# Altium PCB regulator_interposer.pcbdoc
Units mil, origin at the board's own origin, x right, y up, seen from the top; angles counter-clockwise.
Board outline 525 x 425 mil, 2 copper layers (Top Layer, Bottom Layer); 3 components, 3 nets, 7 pads, 0 vias.
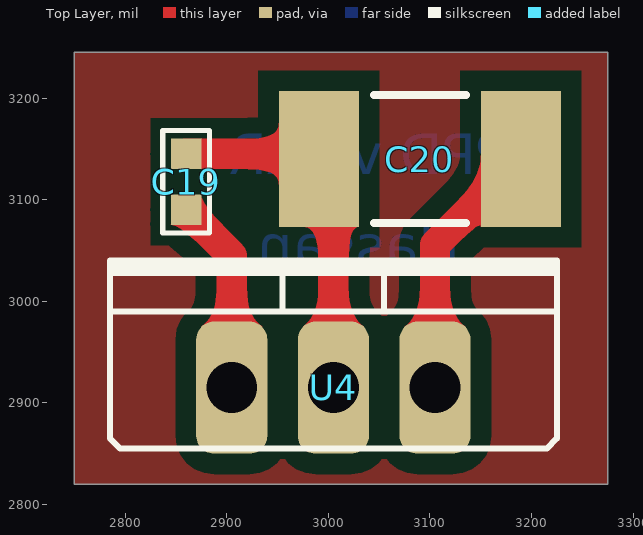
[diagram p0: Top Layer view]
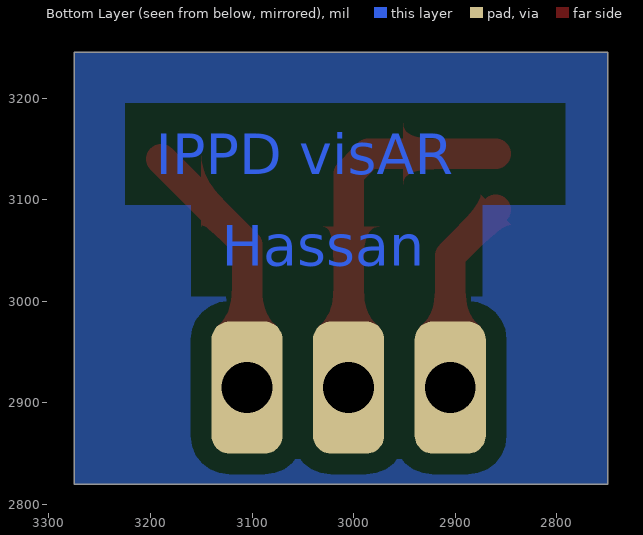
[diagram p1: Bottom Layer view, seen from below]

## Layer stack, top to bottom
Top Solder: solder mask 0.4, Solder Resist, Dk 3.5
Top Layer: signal copper 1.4
Dielectric 1: dielectric 12.6, FR-4, Dk 4.8
Bottom Layer: signal copper 1.4
Bottom Solder: solder mask 0.4, Solder Resist, Dk 3.5

## Board outline
2750,2820 2750,3245 3275,3245 3275,2820

## Design rules (kind name [scope] priority, off if disabled: settings)
Clearance "Poly Clearance" [All vs InPolygon] p1: gap=20
Clearance [All] p2: gap=10
PolygonConnect [All] p1: connectstyle=Relief reliefconductorwidth=10 reliefentries=4 polygonreliefangle="90 Angle" airgapwidth=10
RoutingVias [All] p1: holewidth=28 width=50 viastyle="Through Hole" minholewidth=28 minwidth=50 maxholewidth=28 maxwidth=50
SolderMaskExpansion [All] p1: expansion=4
Width [All] p1: maxlimit=100 minlimit=10 preferedwidth=10 bottomlayer_maxwidth=10 minimp=50.000000 maximp=50.000000 favimp=50.000000
30 further rules are at their usual default settings.

## Components (designator, comment, footprint, x,y, rotation, side; value= is the part's Value field where it differs from the comment)
C19 "100nF" 0603C-GENERIC 2860,3090 r90 top
C20 "10uF" CAPC6032X25N 3090,3140 r180 top
U4 "L7803" to220-123-v 2905,2915 r0 top

## Footprints (in the part's own frame and the unit in brackets; to place one, negate y for a bottom-side part, rotate by r counter-clockwise, add the part's x,y. Pads: shape width x height; smd on the part's side, far side on the other; paste and mask are expansions set on the pad)
0603C-GENERIC [mil] "CAPACITOR 0603"
  rect 30x30 smd: 1(0,0) 2(55,0)
  silkscreen extent -23,-23 78,23, body extent -4,-15 59,15, height 19
CAPC6032X25N [mm] "Chip Capacitor, 2-Leads, Body 6.00x3.20mm, IPC Medium Density"
  rect 2x3.4 smd: 1(-2.525,0) 2(2.525,0)
  silkscreen extent -1.15,-1.6 1.15,1.6, body extent -3.15,-1.7 3.15,1.7, height 2.5
to220-123-v [mil] "TO220 123 pin numbering Vertical mount"
  rrect50% 70x130 hole 50: 1(0,0) 2(100,0) 3(200,0)
  silkscreen extent -120,-60 320,125, body extent -121,-59 321,126, height 945

## Part data
C19: library part 0603C-100NF-25V-X7R-TDK, "CAPACITOR 0603 CERAMIC"
C20: library part 0603C-10UF-10V-X5R-TDK, "CAPACITOR 2413 TANT"
U4: library part L7805-TO220, "LINEAR REGULATOR 5.0V"

## Nets (pads, with @x,y where several pads share a name; then routed paths per layer and width w, separated by ;. In a path a pad name is that pad's centre, name@x,y a point inside that pad or via, vN(x,y) a via of type N, cw(c..) or ccw(c..) an arc to the next point about the centre after c; other vN are vias at no path point)
NetC19_1: C19.1 U4.1 | length 193.6
  Top Layer w30: C19.1 2905,3045 U4.1
NetC19_2: C19.2 C20.2 U4.2 | length 363.6
  Top Layer w30: C19.2 2985.59,3145 C20.2 3005,3125.59 U4.2
NetC20_1: C20.1 U4.3 | length 260
  Top Layer w30: U4.3 3105,3055.59 C20.1

## Polygon pours and split planes (outlines as drawn)
no net on Top Layer "Bottom Layer-GND" (solid, pour order 6): 2750,3245 3275,3245 3275,2820 2750,2820 2750,3245
no net on Bottom Layer "Bottom Layer-GND" (solid, pour order 8): 2750,3245 3275,3245 3275,2820 2750,2820

## Other copper
Bottom Layer:
  text "IPPD visAR" at 3195,3125 h40
  text "Hassan" at 3130,3035 h40